# Altium PCB PCB1.PcbDoc
Units mil, origin at the board's own origin, x right, y up, seen from the top; angles counter-clockwise.
Board outline 499.16 x 3938.79 mil, 2 copper layers (Top Layer, Bottom Layer), stack 4.8 mil thick; 2 components, 12 nets, 46 pads, 12 vias.
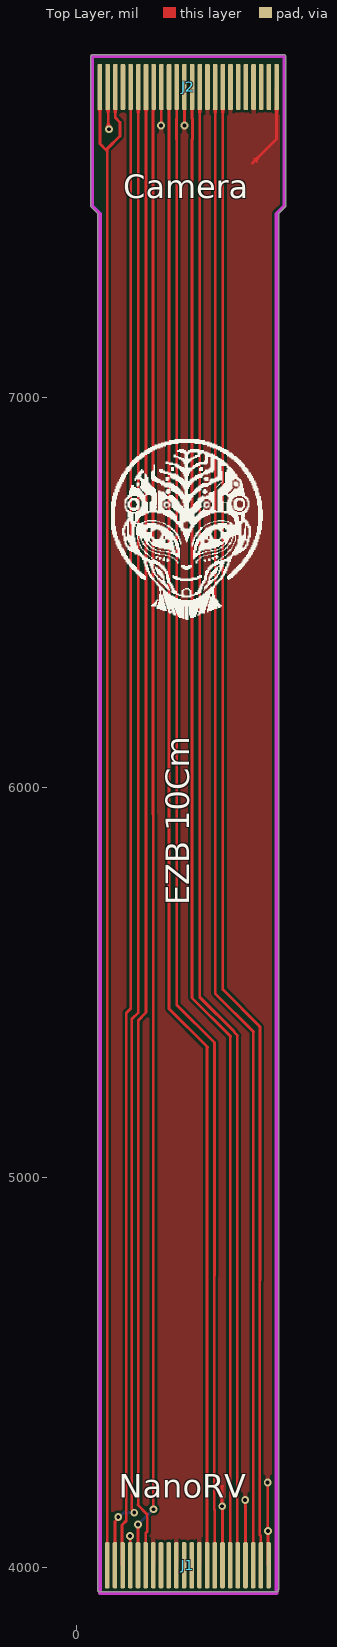
[diagram p0: Top Layer view]
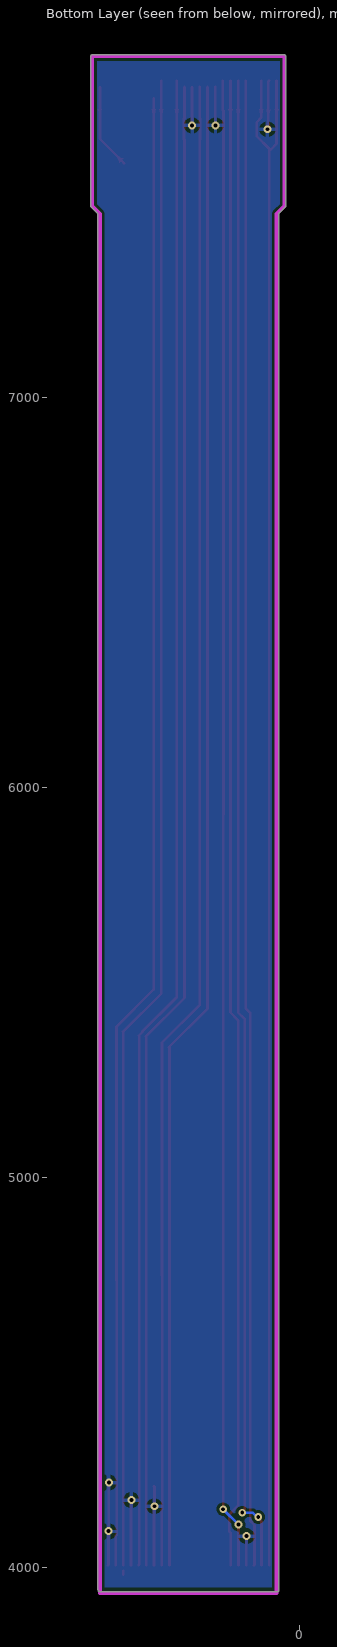
[diagram p1: Bottom Layer view, seen from below]

## Layer stack, top to bottom
Top Solder: solder mask 1, Polymide + Adhesive, Dk 3.5
Top Layer: signal copper 1.4
Dielectric 1: dielectric 2, Polymide + Adhesive, Dk 4.8
Bottom Layer: signal copper 1.4
Bottom Solder: solder mask 1, Polymide + Adhesive, Dk 3.5

## Board outline
58.15,3938.74 cw(c58.15,3943.76) 54.04,3946.63 54.04,7470.47 cw(c59.05,7470.47) 54.04,7470.52 36.88,7487.67 cw(c39.37,7490.16) 35.86,7490.16 35.86,7874.02 cw(c39.37,7874.02) 39.37,7877.53 531.5,7877.53 cw(c531.5,7874.02) 533.98,7876.5 ccw(c531.5,7874.02) 531.5,7877.53 533.98,7876.5 cw(c531.5,7874.02) 535.01,7874.02 535.01,7490.16 cw(c531.5,7490.16) 533.98,7487.67 516.83,7470.52 cw(c511.32,7470.47) 516.83,7470.47 516.83,3944.66 cw(c511.81,3944.66) 514.88,3940.69 cw(c510.91,3943.76) 510.91,3938.74

## Design rules (kind name [scope] priority, off if disabled: settings)
Clearance [All] p1: gap=7 ignorepadtopadclearanceinfootprint=FALSE except(0: Arc-Hole Track-Hole SMDPad-Hole THPad-Hole Via-Hole Fill-Hole Poly-Hole Region-Hole Text-Hole; 10: Arc-THPad Arc-Text Track-THPad Track-Text SMDPad-THPad SMDPad-Text THPad-THPad THPad-Text Via-Text Fill-Text Poly-Text Region-Text Text-Text)
DiffPairsRouting [All] p1: maxlimit=10 minlimit=10 mostfreqgap=10 toplayer_minwidth=15 toplayer_maxwidth=15 toplayer_prefwidth=15 bottomlayer_minwidth=15 bottomlayer_maxwidth=15 bottomlayer_prefwidth=15 substack1={1449F9AA-E402-4FDA-99EC-40BEBEE8243C} toplayer_{1449f9aa-e402-4fda-99ec-40bebee8243c}_minwidth=15 toplayer_{1449f9aa-e402-4fda-99ec-40bebee8243c}_maxwidth=15 toplayer_{1449f9aa-e402-4fda-99ec-40bebee8243c}_prefwidth=15 bottomlayer_{1449f9aa-e402-4fda-99ec-40bebee8243c}_minwidth=15 bottomlayer_{1449f9aa-e402-4fda-99ec-40bebee8243c}_maxwidth=15 bottomlayer_{1449f9aa-e402-4fda-99ec-40bebee8243c}_prefwidth=15 substack2={19C4B3F2-1E79-4BAD-B411-4FEB6234C79E} toplayer_{19c4b3f2-1e79-4bad-b411-4feb6234c79e}_minwidth=15 toplayer_{19c4b3f2-1e79-4bad-b411-4feb6234c79e}_maxwidth=15 toplayer_{19c4b3f2-1e79-4bad-b411-4feb6234c79e}_prefwidth=15 bottomlayer_{19c4b3f2-1e79-4bad-b411-4feb6234c79e}_minwidth=15 bottomlayer_{19c4b3f2-1e79-4bad-b411-4feb6234c79e}_maxwidth=15 bottomlayer_{19c4b3f2-1e79-4bad-b411-4feb6234c79e}_prefwidth=15 maxuncoupledlength=500
PolygonConnect [All] p1: connectstyle=Relief reliefconductorwidth=10 reliefentries=4 polygonreliefangle="90 Angle" airgapwidth=10
RoutingVias [All] p1: holewidth=28 width=50 viastyle="Through Hole" minholewidth=28 minwidth=50 maxholewidth=28 maxwidth=50
SolderMaskExpansion [All] p1: expansion=4 istentingtop=FALSE
Width [All] p1: maxlimit=20 minlimit=7 preferedwidth=10 substack1={1449F9AA-E402-4FDA-99EC-40BEBEE8243C} substack2={19C4B3F2-1E79-4BAD-B411-4FEB6234C79E}
29 further rules are at their usual default settings.

## Components (designator, comment, footprint, x,y, rotation, side; value= is the part's Value field where it differs from the comment)
J1 "LicheeRV" Nano 491.22,4006.81 r180 top
J2 "CameraSide" Camera 511.81,7795.28 r180 top

## Footprints (in the part's own frame and the unit in brackets; to place one, negate y for a bottom-side part, rotate by r counter-clockwise, add the part's x,y. Pads: shape width x height; smd on the part's side, far side on the other; paste and mask are expansions set on the pad)
Camera [mm]
  rrect50% 0.3x3 smd: 0(0,0) 1(0.5,0) 2(1,0) 3(1.5,0) 4(2,0) 5(2.5,0) 6(3,0) 7(3.5,0) 8(4,0) 9(4.5,0) 10(5,0) 11(5.5,0) 12(6,0) 13(6.5,0) 14(7,0) 15(7.5,0) 16(8,0) 17(8.5,0) 18(9,0) 19(9.5,0) 20(10,0) 21(10.5,0) 22(11,0) 23(11.5,0)
Nano [mm]
  rrect50% 0.3x3 smd: 0(0,0) 1(0.5,0) 2(1,0) 3(1.5,0) 4(2,0) 5(2.5,0) 6(3,0) 7(3.5,0) 8(4,0) 9(4.5,0) 10(5,0) 11(5.5,0) 12(6,0) 13(6.5,0) 14(7,0) 15(7.5,0) 16(8,0) 17(8.5,0) 18(9,0) 19(9.5,0) 20(10,0) 21(10.5,0)

## Part data
J2: library part CameraSide_1

## Via types
v1: diameter 20, hole 10, Top Layer to Bottom Layer, 12 vias

## Nets (pads, with @x,y where several pads share a name; then routed paths per layer and width w, separated by ;. In a path a pad name is that pad's centre, name@x,y a point inside that pad or via, vN(x,y) a via of type N, cw(c..) or ccw(c..) an arc to the next point about the centre after c; other vN are vias at no path point)
GND: J1.0 J1.3 J1.6 J1.9 J1.12 J1.15 J1.18 J2.0 J2.3 J2.6 J2.9 J2.12 J2.15 J2.22 | length 1354.9
  Top Layer w7: J2.22@78.74,7811.02 80.16,7809.6 80.16,7689.4 v1(82.56,7687.01) ; v1(136.07,4081.55) 136.48,4081.14 136.48,4007.22 J1.18 ; v1(215.72,7696.8) 216.13,7697.21 216.13,7794.87 J2.15 ; v1(275.64,7696.8) J2.12@275.62,7795.25 ; v1(372.3,4158.11) 372.19,4158.22 372.19,4208.58 373.11,4209.5 ; J1.6 373.11,4081.55 v1@373.11,4157.29 ; v1(431.25,4173.87) 431.71,4173.41 431.71,4007.27 J1.3 432.17,4160.29 ; 450,7600 511.81,7661.81 J2.0 ; v1(488.91,4218.76) 489.09,4218.57 489.09,4095.2 v1(489.81,4094.48) ; v1@490.06,4094.48 490.06,4007.97 J1.0
NetJ1_1: J1.1 J2.7 | length 3800.1
  Top Layer w7: J2.7@374.02,7765.75 374.02,5482.28 469.31,5386.99 469.31,4736.36 468.41,4735.46 468.41,4084.83 471.54,4081.7 J1.1
NetJ1_2: J1.2 J2.8 | length 3855.1
  Top Layer w7: J2.8@354.33,7811.02 354.33,5472.44 452.76,5374.02 451.85,5373.11 J1.2 ; J1.2@451.85,3983.13 J1.2@451.85,3992.89
NetJ1_4: J1.4 J2.10 | length 3845.4
  Top Layer w7: J2.10@314.96,7811.02 314.96,5462.6 403.54,5374.02 403.54,5372.6 411.65,5364.49 410.75,5363.59 410.75,4008.55 J1.4
NetJ1_5: J1.5 J2.11 | length 3830.3
  Top Layer w7: J2.11 295.28,7714.45 296.14,7713.58 296.14,7660.87 295.28,7660 295.28,5461.07 393.7,5362.65 392.8,5361.74 J1.5
NetJ1_7: J1.7 J2.13 | length 3830.2
  Top Layer w7: J2.13 255.91,7714.39 255.14,7713.63 255.14,7660.76 255.91,7660 255.91,5442.91 352.7,5346.12 352.7,4748.32 351.8,4747.42 351.8,4149.62 353.43,4147.99 J1.7
NetJ1_8: J1.8 J2.14 | length 3829.6
  Top Layer w7: J2.14 236.22,7660 236.22,5433.07 334.65,5334.65 333.74,5333.74 J1.8
NetJ1_16: J1.16 J2.17 | length 3824.1
  Top Layer w7: J1.16 176.26,4088.97 180.07,4092.79 180.07,4137.57 156.57,4161.07 157.48,4161.98 157.48,5403.54 177.17,5423.23 J2.17@177.17,7811.02
NetJ1_17: J1.17 J2.16 | length 3821.6
  Top Layer w7: J1.17 v1(156.57,4111.08) ; v1(195.99,4150.49) 195.99,5930.5 195.22,5931.28 195.22,7734.57 196.87,7736.22 J2.16@196.87,7811
  Bottom Layer w7: v1(156.57,4111.08) v1(195.99,4150.49)
NetJ1_19: J1.19 J2.19 | length 3814.1
  Top Layer w7: J1.19 115.78,4008.23 115.78,4072.85 115.57,4073.06 115.57,4109.99 126.59,4121 126.59,5421.86 137.8,5433.07 J2.19 J2.19@137.8,7811.02
NetJ1_20: J1.20 J2.18 | length 3852.1
  Top Layer w7: J1.20 97.52,4118.68 106.09,4127.25 v1(106.09,4130.76) ; v1(147.09,4141.57) 147.09,4145.09 140.59,4151.59 140.59,5406.8 157.48,5423.69 J2.18@157.48,7811.02
  Bottom Layer w7: v1(106.09,4130.76) 109.6,4130.76 120.41,4141.57 v1(147.09,4141.57)
NetJ1_21: J1.21 J2.21 J2.23 | length 4010.3
  Top Layer w7: J2.23@59.05,7811.02 59.05,7649.85 74.93,7633.98 77.83,7636.89 ; J1.21 77.83,7636.89 ; J2.21@98.43,7811.02 98.43,7716.54 110.24,7704.72 110.24,7669.29 77.83,7636.89
pads on no net: J1.10 J1.11 J1.13 J1.14 J2.1 J2.2 J2.4 J2.5 J2.20

## Polygon pours and split planes (outlines as drawn)
GND on Bottom Layer "GND_L02_P000" (solid, pour order 0): 59.06,3938.74 511.81,3938.74 511.81,7470.47 531.5,7490.16 531.5,7874.02 39.37,7874.02 39.37,7490.16 59.06,7470.47
GND on Top Layer "GND_L01_P001" (solid, pour order 1): 59.06,4015.75 511.81,4015.75 511.81,7470.47 531.5,7490.16 531.5,7874.02 39.37,7874.02 39.37,7490.16 59.06,7470.47

## Keep-outs
Keep-Out Layer:
  lines w10: 39.37,7874.02 531.5,7874.02 ; 39.37,7874.02 39.37,7874.02 ; 39.37,7874.02 39.37,7490.16 59.06,7470.47 59.06,3935.47 511.81,3935.47 511.81,7470.47 531.5,7490.16 531.5,7874.02 ; 531.5,7874.02 531.5,7874.02

## Silkscreen, mask and mechanical layers (free items; w line width, h text height)
Top Overlay:
  drawing of 41 lines, arcs and shapes, not listed
  text "Camera" at 118.27,7510 h60
  text "EZB 10Cm" at 288.37,5698.07 h60 r90
  text "NanoRV" at 107.52,4180.13 h60
Stiffener:
  lines w10: 51.61,7722.92 519.26,7722.92 519.26,7861.78 51.61,7861.78 51.61,7722.92 ; 63.09,3943.76 504.09,3943.76 504.09,4077.76 63.09,4077.76 63.09,3943.76
Mechanical 16:
  lines w7: 39.37,7490.16 59.06,7470.47 39.37,7490.16 ; 39.37,7490.16 39.37,7874.02 ; 39.37,7490.16 39.37,7874.02 ; 39.37,7874.02 531.5,7874.02 ; 39.37,7874.02 531.5,7874.02 ; 510.91,3943.76 510.91,4016.59 510.91,3943.76 ; 510.91,3943.76 58.15,3943.76 510.91,3943.76 ; 531.5,7490.16 531.5,7874.02 ; 531.5,7490.16 531.5,7874.02 ; 531.5,7490.16 511.81,7470.47 531.5,7490.16 ; 531.5,7874.02 531.5,7874.02 ; 531.5,7874.02 531.5,7874.02
  lines w10: 59.06,7470.47 59.06,3944.66 58.15,3943.76 ; 63.09,3943.76 58.15,3943.76 ; 510.91,3943.76 58.15,3943.76 ; 511.81,3944.66 511.81,7470.47